# Altium PCB PCB1.PcbDoc
Units mm, origin at the board's own origin, x right, y up, seen from the top; angles counter-clockwise.
Board outline 53.72 x 37.59 mm, 2 copper layers (Top Layer, Bottom Layer); 50 components, 30 nets, 167 pads, 46 vias.
Unrouted connection lines stored in the file: 2.
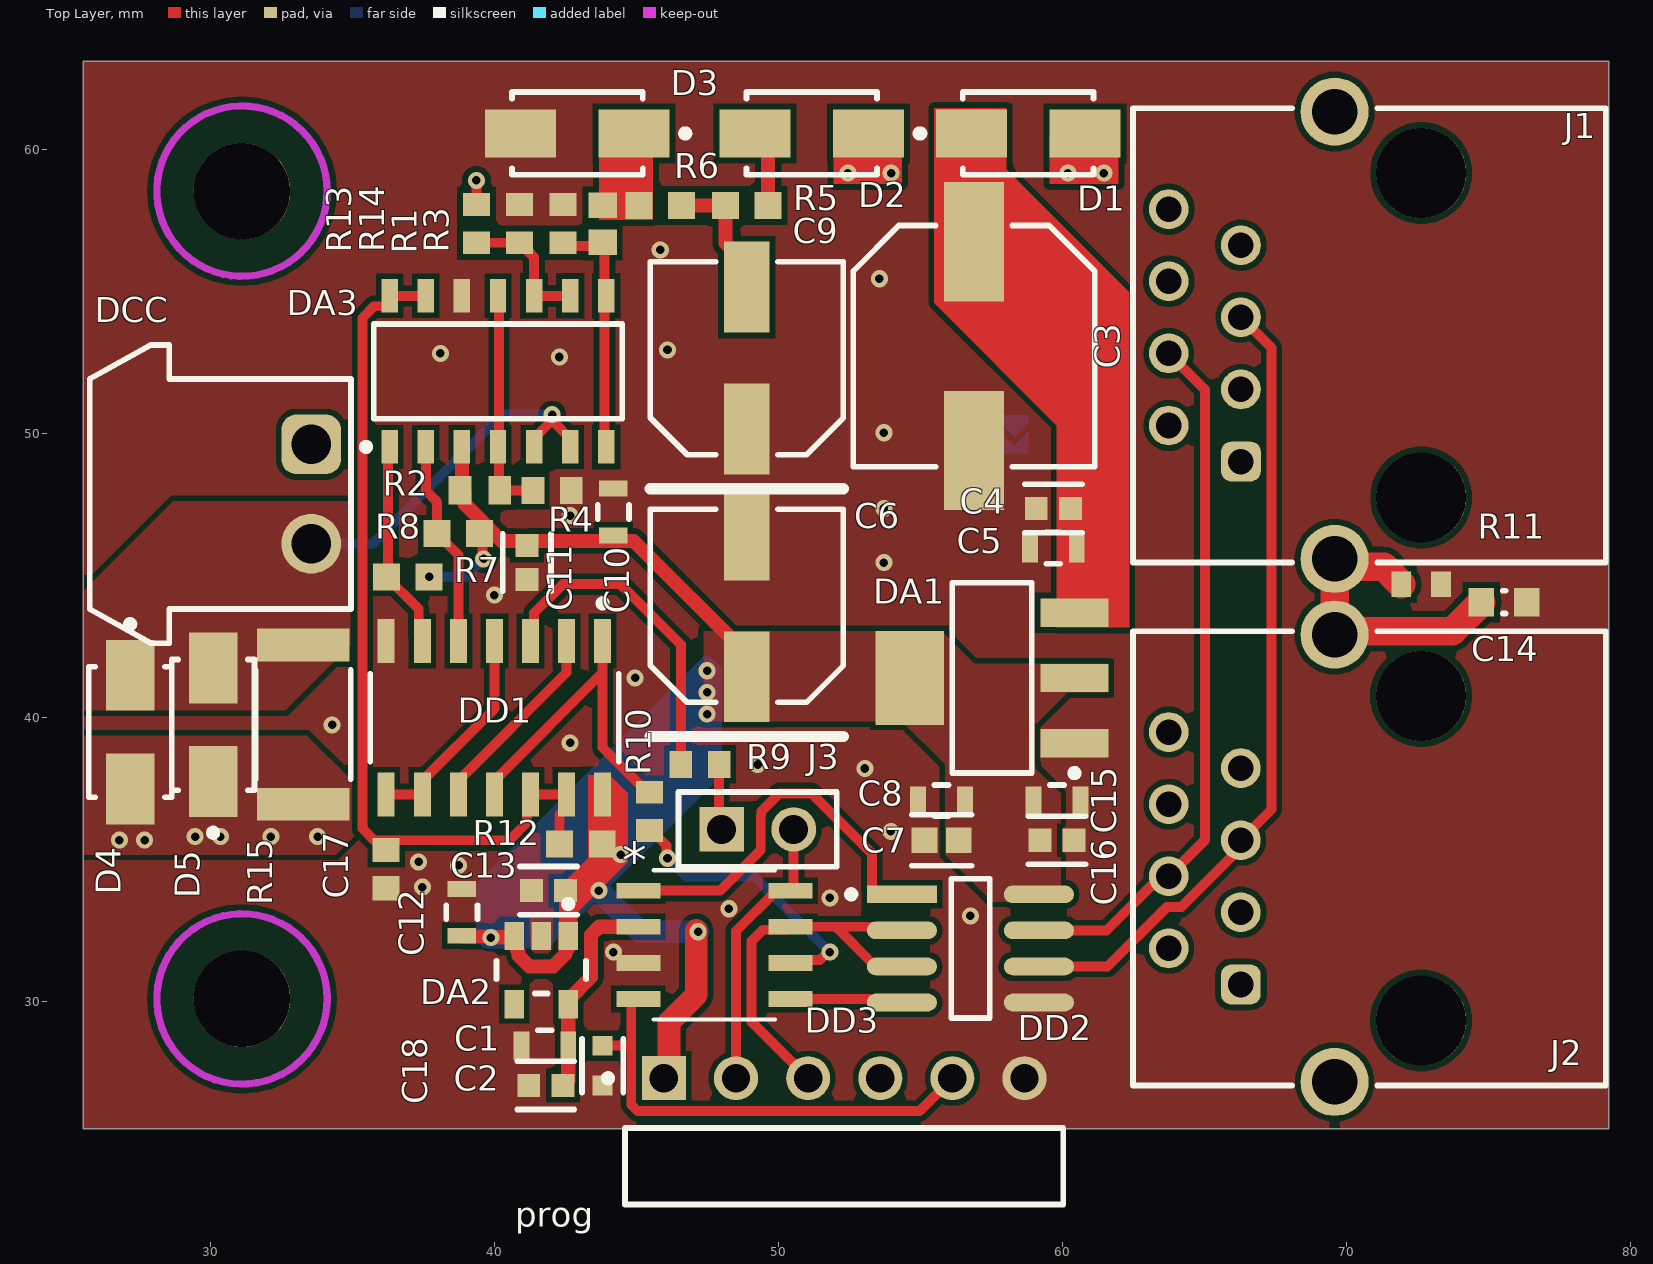
[diagram p0: Top Layer view]
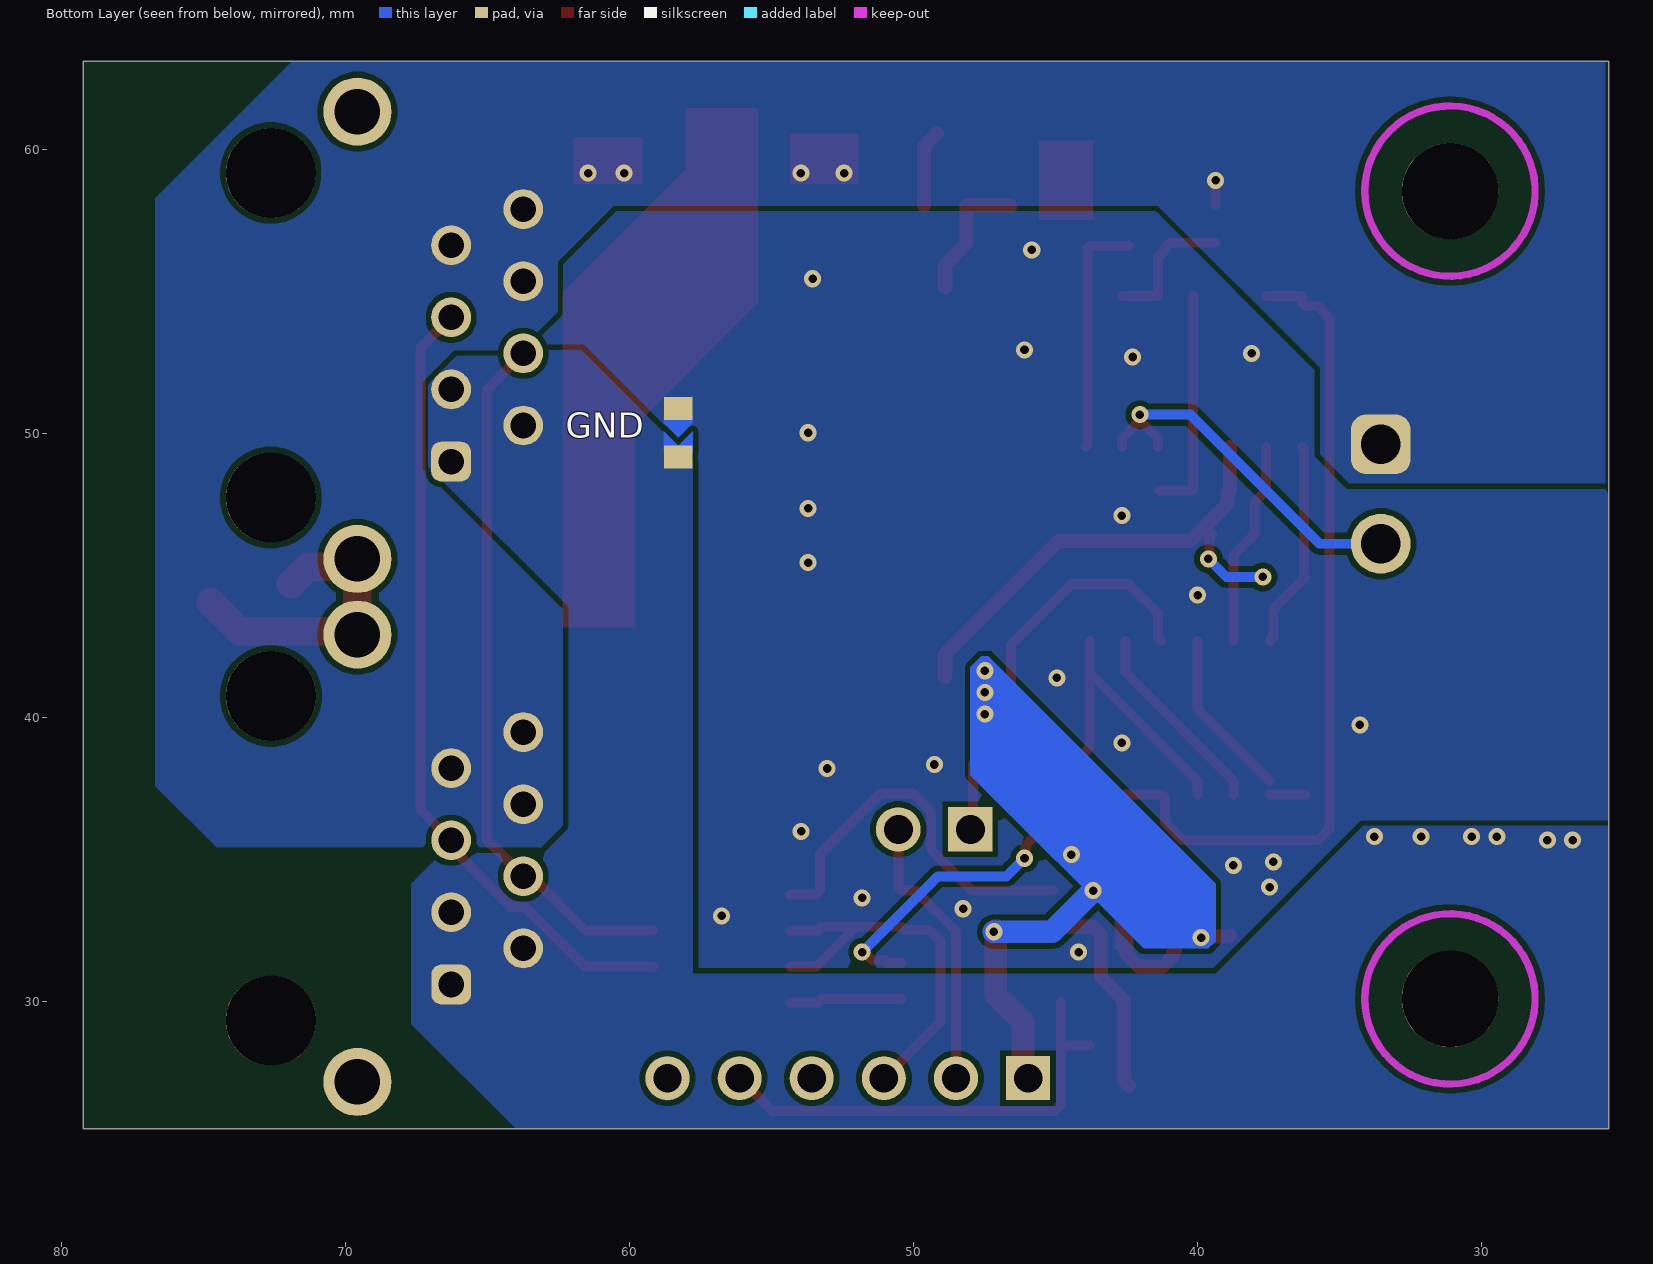
[diagram p1: Bottom Layer view, seen from below]
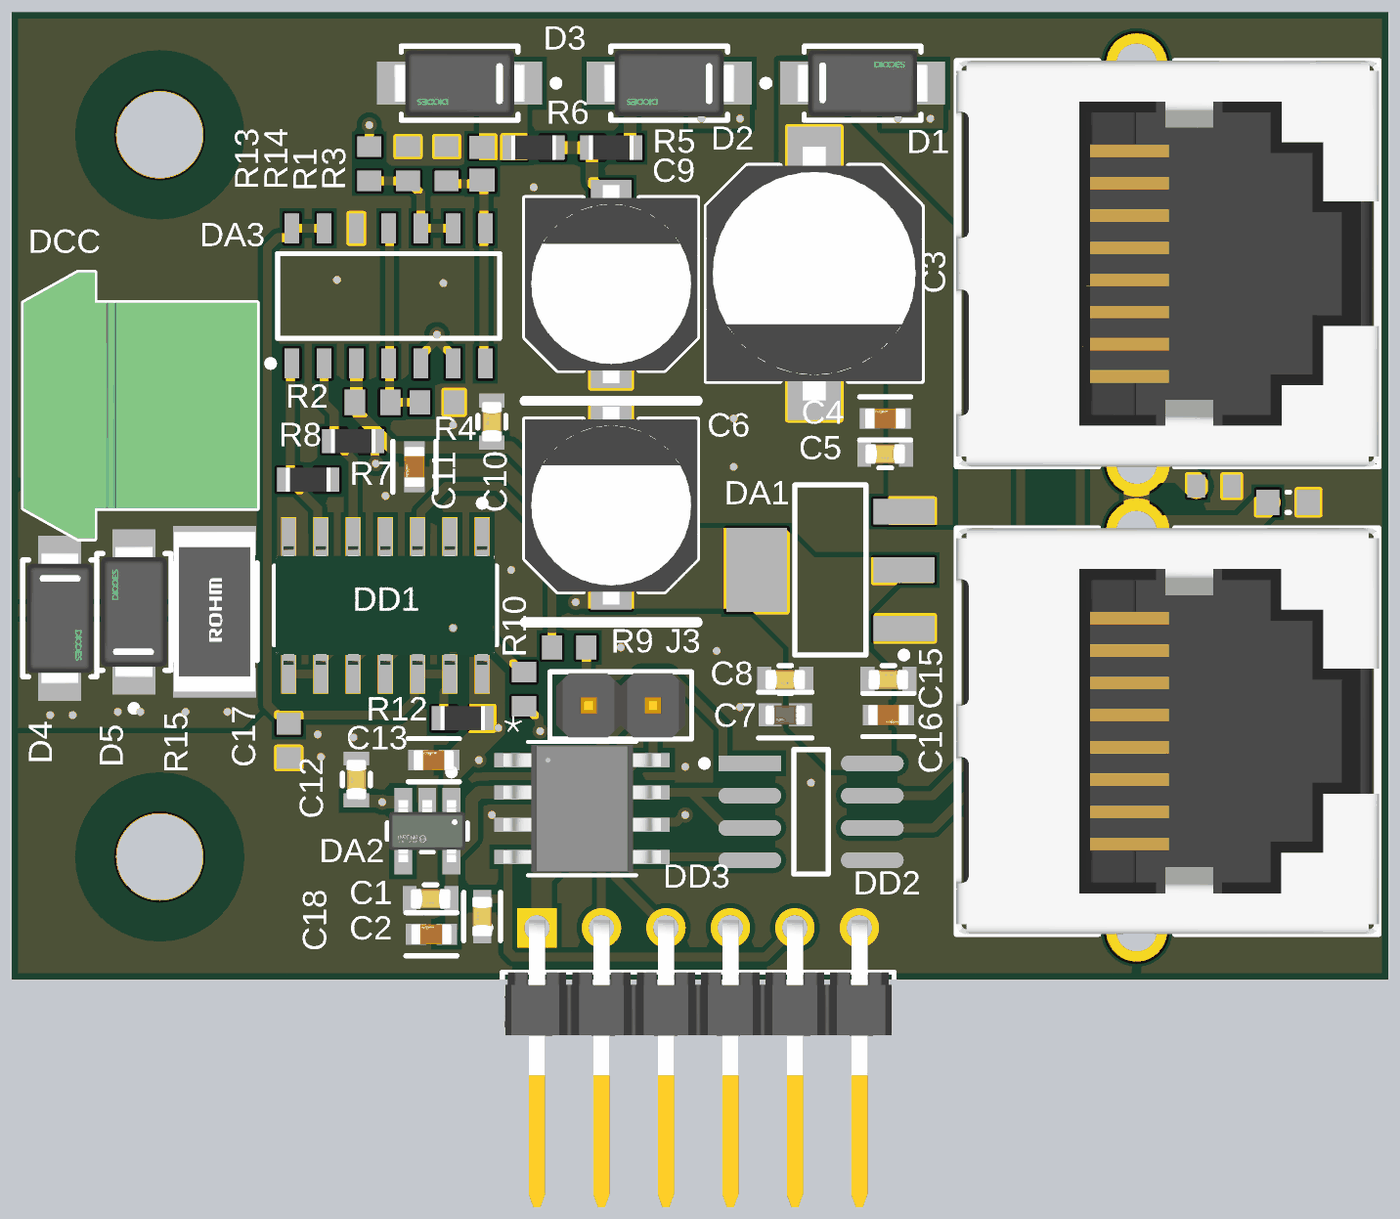
[diagram p2: 3D render of the assembled board from above, using the file's embedded part models]

## Layer stack, top to bottom
Top Solder: solder mask 0.0102, Solder Resist, Dk 3.5
Top Layer: signal copper 0.0356
Dielectric 1: dielectric 0.32, FR-4, Dk 4.8
Bottom Layer: signal copper 0.0356
Bottom Solder: solder mask 0.0102, Solder Resist, Dk 3.5

## Board outline
25.527,25.527 25.527,63.119 79.248,63.119 79.248,25.527

## Design rules (kind name [scope] priority, off if disabled: settings)
Clearance [All] p1: gap=0.2 ignorepadtopadclearanceinfootprint=FALSE
PolygonConnect [All] p1: connectstyle=Direct reliefconductorwidth=0.254 reliefentries=4 polygonreliefangle="90 Angle" airgapwidth=0.254
RoutingVias [All] p1: holewidth=0.3 width=0.7 viastyle="Through Hole" minholewidth=0.3 minwidth=0.5 maxholewidth=3 maxwidth=5
SolderMaskExpansion [All] p1: expansion=0.102 istentingtop=FALSE
SupplyNets "Schematic Supply Nets_1" [InNet('GND')] p1: voltage=0.000
SupplyNets "Schematic Supply Nets_5" [InNet('-V')] p2: voltage=0.000
SupplyNets "Schematic Supply Nets_3" [InNet('+12V')] p3: voltage=0.000
SupplyNets "Schematic Supply Nets_2" [InNet('+5V')] p4: voltage=0.000
SupplyNets "Schematic Supply Nets" [InNet('+3V3')] p5: voltage=0.000
Width [All] p1: maxlimit=1 minlimit=0.254 preferedwidth=0.3
30 further rules are at their usual default settings.

## Components (designator, comment, footprint, x,y, rotation, side; value= is the part's Value field where it differs from the comment)
C1 "CGA3E2X7R1H104K080AA" FP-CGA3E-0_3-0_1-IPC_C 41.783,28.448 r180 top
C2 "GRM188R60J106ME47D" FP-GRM188-0_1-e0_2_0_55-IPC_C 41.816,27.051 r180 top
C3 "EEE-FK1E221P" PNSC-EEE-FK1E221P_N 56.896,53.086 r270 top value=220uF
C4 "GRM188R60J106ME47D" FP-GRM188-0_1-e0_2_0_55-IPC_C 59.69,47.371 r180 top
C5 "CGA3E2X7R1H104K080AA" FP-CGA3E-0_3-0_1-IPC_C 59.69,45.974 r180 top
C6 "EEEFK1E101XP" PNSC-FK-V-D8_V 48.895,43.942 r90 top
C7 "GRM188R61A226ME15D" FP-GRM188-0_2-IPC_C 55.753,35.687 r180 top
C8 "CGA3E2X7R1H104K080AA" FP-CGA3E-0_3-0_1-IPC_C 55.753,37.084 r180 top
C9 "EEEFK1E101XP" PNSC-FK-V-D8_V 48.895,52.665 r90 top
C10 "CGA3E2X7R1H104K080AA" FP-CGA3E-0_3-0_1-IPC_C 44.196,47.244 r90 top
C11 "GRM188R60J106ME47D" FP-GRM188-0_1-e0_2_0_55-IPC_C 41.148,45.466 r270 top
C12 "CGA3E2X7R1H104K080AA" FP-CGA3E-0_3-0_1-IPC_C 38.862,33.147 r90 top
C13 "GRM188R60J106ME47D" FP-GRM188-0_1-e0_2_0_55-IPC_C 41.91,33.909 r180 top
C14 "CAP 10pF 25V 0603(1608)" CAPC0603(1608)100_N 75.565,44.069 r0 top value=10pF
C15 "CGA3E2X7R1H104K080AA" FP-CGA3E-0_3-0_1-IPC_C 59.817,37.084 r0 top
C16 "GRM188R60J106ME47D" FP-GRM188-0_1-e0_2_0_55-IPC_C 59.817,35.687 r0 top
C17 "GRM188R71H102KA01D" CAPC1608X90X35NL10T15 36.195,34.671 r90 top value=1n
C18 "CGA3E2X7R1H104K080AA" FP-CGA3E-0_3-0_1-MFG 43.815,27.751 r90 top
D1 "B340A-13-F" FP-SMA-MFG 58.801,60.579 r0 top
D2 "B340A-13-F" FP-SMA-MFG 51.181,60.579 r180 top
D3 "B340A-13-F" FP-SMA-MFG 42.926,60.579 r180 top
D4 "B340A-13-F" FP-SMA-MFG 27.178,39.497 r270 top
D5 "B340A-13-F" FP-SMA-MFG 30.099,39.751 r90 top
DA1 "LD1117S50CTR" SOT-223_N 57.531,41.402 r180 top
DA2 "NCP114ASN330T1G" FP-483-MFG 41.656,31.115 r270 top
DA3 "LM339DR2G" ONSC-SOIC-14-751A-03_V 40.132,52.197 r90 top
DCC "15EDGRC-3.5-02" 691305140002 30.353,47.879 r270 top
DD1 "CD4001BM" FP-D0014A-MFG 40.005,40.005 r270 top
DD2 "THVD1500D" FP-D0008B-IPC_A 56.769,31.877 r0 top
DD3 "STM32G031J6Mx" SO-8 47.752,32.004 r0 top value=Value
GND "" JP_SMD 58.293,50.038 r90 bottom
J1 "615008140421" 615008140421 70.82,53.468 r90 top
J2 "615008140421" 615008140421 70.818,35.052 r90 top
J3 "M20-9990245" FP-M20-9990245-MFG 49.276,36.068 r0 top
prog "901210766" FP-901210766-MFG 52.324,24.305 r0 top
R1 "ERJ3EKF8203V" RESC1608X55X30NL15T15#1 42.418,57.404 r90 top value=820
R2 "RK73H1JTTD2703F" RESC1608X55X30NL20T10 39.497,48.006 r180 top value=270k
R3 "ERA3AEB333V" RESC1608X55X30NL20T20 43.815,57.404 r270 top value=33k
R4 "ERJ-3EKF1001V" RESC1608X55X30NL15T15#1 42.037,48.006 r180 top value=1k
R5 "ERJ-3EKF2200V" RESC1608X55X30NL15T15#2 48.895,58.039 r0 top value=220
R6 "ERJ-3EKF2200V" RESC1608X55X30NL15T15#2 45.847,58.039 r180 top value=220
R7 "ERJ3EKF1002V" RESC1609X55X30NL15T15 36.957,44.958 r180 top value=10k
R8 "ERJ3EKF1002V" RESC1609X55X30NL15T15 38.735,46.482 r180 top value=10k
R9 "ERJ-3EKF1001V" RESC1608X55X30NL15T15#1 47.244,38.354 r180 top value=1k
R10 "ERJ-3EKF1001V" RESC1608X55X30NL15T15#1 45.466,36.703 r90 top value=1k
R11 "RC0603FR-071ML" RESC1608X55X25NL10T15 72.644,44.704 r0 top value=1M
R12 "ERJ3EKF1002V" RESC1609X55X30NL15T15 43.053,35.56 r180 top value=10k
R13 "ERJ-3EKF1003V" RESC1608X55X30NL15T15#1 39.37,57.404 r90 top value=100k
R14 "ERJ-3EKF1001V" RESC1608X55X30NL15T15#1 40.894,57.404 r90 top value=1k
R15 "MCR100JZHJ1R8" FP-MCR100-IPC_C 33.274,39.758 r90 top

## Footprints (in the part's own frame and the unit in brackets; to place one, negate y for a bottom-side part, rotate by r counter-clockwise, add the part's x,y. Pads: shape width x height; smd on the part's side, far side on the other; paste and mask are expansions set on the pad)
615008140421 [mm] "Modular Jack Vertical Shielded 8P8C Rear Post"
  rrect50% 1.4x1.4 hole 0.9: 1(-4.445,4.524)
  round 1.4 hole 0.9: 2(-3.175,7.064) 3(-1.905,4.524) 4(-0.635,7.064) 5(0.635,4.524) 6(1.905,7.064) 7(3.175,4.524) 8(4.445,7.064)
  round 3.17 hole 3.17 unplated: M1(-5.715,-1.826) M2(5.715,-1.826)
  round 2.4 hole 1.6: Shell(-7.875,1.224) Shell(7.875,1.224)
  silkscreen extent -8,-8.32 8,8.32, body extent -8,-8.32 8,8.33, height 16.65
691305140002 [mm] "Horizontal PCB Header with Plastic Latch, pitch 3.5mm, 02p"
  rrect50% 2.1x2.1 hole 1.4: 1(-1.75,3.2)
  round 2.1 hole 1.4: 2(1.75,3.2)
  silkscreen extent -5.25,-4.6 5.25,4.6, body extent -5.25,-4.6 5.25,4.6, height 7.25
CAPC0603(1608)100_N [mm] "Chip Capacitor, Body 1.6x0.8mm, Height 1.0mm, IPC Medium Density"
  rect 0.9x1 smd: 1(-0.8,0) 2(0.8,0)
  silkscreen extent -0.05,-0.4 0.05,0.4, body extent -0.87,-0.48 0.88,0.47, height 1
CAPC1608X90X35NL10T15 [mm] "Chip Capacitor, 2-Leads, Body 1.60x0.80mm, IPC Medium Density"
  rect 0.85x0.95 smd: 1(-0.675,0) 2(0.675,0)
  body extent -0.85,-0.45 0.85,0.45, height 0.9
FP-483-MFG [mm]
  rect 1x0.7 smd paste+0 mask+0: 1(-1.2,0.95) 2(-1.2,0) 3(-1.2,-0.95) 4(1.2,-0.95) 5(1.2,0.95)
  silkscreen extent -2.45,-1.58 0.82,1.58, body extent -1.22,-1.5 1.22,1.5, height 1.1
FP-901210766-MFG [mm]
  rect 1.55x1.55 hole 1 paste-2539.97 mask+0: 1(-6.35,3)
  round 1.55 hole 1 paste-2539.97 mask+0: 2(-3.81,3) 3(-1.27,3) 4(1.27,3) 5(3.81,3) 6(6.35,3)
  silkscreen extent -8.44,-1.45 7.72,3.12, body extent -7.82,-8.5 7.82,3.88, height 0.25
FP-CGA3E-0_3-0_1-IPC_C [mm]
  rect 0.556x1.006 smd paste+0 mask+0: 1(-0.825,0) 2(0.825,0)
  silkscreen extent -0.25,-0.55 0.25,0.55, body extent -1.2,-0.65 1.2,0.65, height 0.25
FP-CGA3E-0_3-0_1-MFG [mm]
  rect 0.7x0.7 smd paste+0 mask+0: 1(-0.7,0) 2(0.7,0)
  silkscreen extent -0.95,-0.72 0.95,0.72, body extent -1.15,-0.65 1.15,0.65, height 0.25
FP-D0008B-IPC_A [mm]
  rect 2.469x0.622 smd paste+0 mask+0: 1(-2.414,1.905)
  rrect100% 2.469x0.622 smd paste+0 mask+0: 2(-2.414,0.635) 3(-2.414,-0.635) 4(-2.414,-1.905) 5(2.414,-1.905) 6(2.414,-0.635) 7(2.414,0.635) 8(2.414,1.905)
  silkscreen extent -4.32,-2.45 0.68,2.45
FP-D0014A-MFG [mm]
  rect 1.55x0.6 smd paste-1000 mask+0: 1(-2.7,3.81) 2(-2.7,2.54) 3(-2.7,1.27) 4(-2.7,0) 5(-2.7,-1.27) 6(-2.7,-2.54) 7(-2.7,-3.81) 8(2.7,-3.81) 9(2.7,-2.54) 10(2.7,-1.27) 11(2.7,0) 12(2.7,1.27) 13(2.7,2.54) 14(2.7,3.81)
  silkscreen extent -4.15,-4.38 1.55,4.38, body extent -3.57,-4.62 3.57,4.62, height 0.25
FP-GRM188-0_1-e0_2_0_55-IPC_C [mm]
  rect 0.808x0.812 smd paste+0 mask+0: 1(-0.602,0) 2(0.602,0)
  silkscreen extent -1.01,-0.85 1.01,0.85, body extent -1.11,-0.55 1.11,0.55, height 0.25
FP-GRM188-0_2-IPC_C [mm]
  rect 0.905x0.906 smd paste+0 mask+0: 1(-0.601,0) 2(0.601,0)
  silkscreen extent -1.05,-0.9 1.05,0.9, body extent -0.8,-0.4 0.8,0.4, height 1
FP-M20-9990245-MFG [mm]
  rect 1.57x1.57 hole 1.02 paste-2539.97 mask+0: 1(-1.27,0)
  round 1.57 hole 1.02 paste-2539.97 mask+0: 2(1.27,0)
  silkscreen extent -2.79,-1.32 2.79,1.32, body extent -2.89,-1.42 2.89,1.42, height 0.25
FP-MCR100-IPC_C [mil]
  rect 45.5x128.28 smd paste+0 mask+0: 1(-110.29,0) 2(110.29,0)
  silkscreen extent -76,-66 76,66, body extent -137,-70 137,70, height 10
FP-SMA-MFG [mm]
  rect 2.5x1.7 smd paste+0 mask+0: 1(-2,0) 2(2,0)
  silkscreen extent -3.92,-1.46 2.3,1.46, body extent -2.6,-1.3 2.6,1.3, height 2.4
JP_SMD [mil]
  rect 32x40 smd: 1(33.75,0) 2(-33.75,0)
  Top Layer region: -28.25,0 -18,0 2,20 -28.25,20
  Top Layer region: -28.25,0 -18,0 2,-20 -28.25,-20
  Top Layer region: 24,20 14,20 -6,0 14,-20 24,-20
ONSC-SOIC-14-751A-03_V [mm] "SOIC, 14-Leads, Body 8.75x4mm, Pitch 1.27mm"
  rect 1.18x0.58 smd: 1(-2.66,3.81) 2(-2.66,2.54) 3(-2.66,1.27) 4(-2.66,0) 5(-2.66,-1.27) 6(-2.66,-2.54) 7(-2.66,-3.81) 8(2.66,-3.81) 9(2.66,-2.54) 10(2.66,-1.27) 11(2.66,0) 12(2.66,1.27) 13(2.66,2.54) 14(2.66,3.81)
  silkscreen extent -2.78,-4.38 1.67,4.77, body extent -2,-4.38 2,4.38, height 1.75
PNSC-EEE-FK1E221P_N [mm] "CAPAE, 2-Leads, Body 8.5x8.5mm, IPC Medium Density"
  rect 4.2x2.1 smd: 1(-3.675,0) 2(3.675,0)
  silkscreen extent -4.25,-4.25 4.25,4.25, body extent -5,-4.25 5,4.25, height 10.5
PNSC-FK-V-D8_V [mm] "CAPAE, 2-Leads, Body 6.80x6.80mm"
  rect 3.2x1.6 smd: 1(-2.5,0) 2(2.5,0)
  silkscreen extent -4.6,-3.4 3.4,3.4, body extent -3.9,-3.4 3.9,3.4, height 8
RESC1608X55X25NL10T15 [mm] "Chip Resistor, 2-Leads, Body 1.70x0.90mm, IPC Medium Density"
  rect 0.7x0.9 smd: 1(-0.7,0) 2(0.7,0)
  body extent -0.85,-0.45 0.85,0.45, height 0.55
RESC1608X55X30NL15T15#1 [mm] "Chip Resistor, 2-Leads, Body 1.60x0.80mm, IPC Medium Density"
  rect 0.8x0.95 smd: 1(-0.675,0) 2(0.675,0)
  body extent -0.87,-0.48 0.87,0.48, height 0.55
RESC1608X55X30NL15T15#2 [mm] "Chip Resistor, 2-Leads, Body 1.75x0.95mm, IPC Medium Density"
  rect 0.95x0.95 smd: 1(-0.75,0) 2(0.75,0)
  body extent -0.87,-0.48 0.87,0.48, height 0.55
RESC1608X55X30NL20T10 [mm] "Chip Resistor, 2-Leads, Body 1.60x0.80mm, IPC Medium Density"
  rect 0.8x1 smd: 1(-0.7,0) 2(0.7,0)
  body extent -0.9,-0.5 0.9,0.5, height 0.55
RESC1608X55X30NL20T20 [mm] "Chip Resistor, 2-Leads, Body 1.60x0.80mm, IPC Medium Density"
  rect 0.9x1 smd: 1(-0.65,0) 2(0.65,0)
  body extent -0.9,-0.5 0.9,0.5, height 0.55
RESC1609X55X30NL15T15 [mm] "Chip Resistor, 2-Leads, Body 1.75x0.95mm, IPC Medium Density"
  rect 0.95x0.95 smd: 1(-0.75,0) 2(0.75,0)
  body extent -0.87,-0.48 0.87,0.48, height 0.55
SO-8 [mil] "STM32 package, SO8N, 4.9 x 6mm"
  rect 61x22 smd paste+0 mask+0: 1(-105.5,75) 2(-105.5,25) 3(-105.5,-25) 4(-105.5,-75) 5(105.5,-75) 6(105.5,-25) 7(105.5,25) 8(105.5,75)
  silkscreen extent -84,-104 84,104, body extent -122,-98 122,99, height 69
SOT-223_N [mm] "SOT223, 4-Leads, Body 6.5x3.5mm, Pitch 2.3mm, Lead Span 7mm, IPC Medium Density"
  rect 2.4x1 smd: 1(-2.9,2.3) 2(-2.9,0) 3(-2.9,-2.3)
  rect 2.4x3.3 smd: 4(2.9,0)
  silkscreen extent -3.03,-3.35 1.4,3.47, body extent -1.85,-3.35 1.85,3.35, height 1.8

## Part data
C1 C5 C8 C10 C12 C15 C18: library part CMP-2000-07546-2, "Cap Ceramic 100nF 50V X7R 10% Pad SMD 0603 +125°C Automotive T/R", Capacitance=100nF, Case Code (Imperial)=0603, Case Code (Metric)=1608, Dielectric=X7R, Max Operating Temperature=125°C, Min Operating Temperature=-55°C, Package Quantity=1, Ratings=AEC-Q200, Tolerance=10%, Voltage=50V, Case/Package=0603, Composition=Ceramic, Depth=0.8mm, Height=0.8mm, Lead Free="Lead Free", Length=1.6mm, Mount="Surface Mount", Packaging="Tape and Reel", Radiation Hardening=No, REACH SVHC="No SVHC", Termination=SMD/SMT, Thickness=0.035inch, Voltage Rating=50V, Voltage Rating (DC)=50V, Weight=7.1E-05oz, Width=0.8mm
C2 C4 C11 C13 C16: library part CMP-2006-02792-2, "Chip Multilayer Ceramic Capacitors for General Purpose, 0603, 10uF, X5R, 15%, 20%, 6.3V", Capacitance=10uF, Case Code (Imperial)=0603, Case Code (Metric)=1608, Dielectric=X5R, Max Operating Temperature=85°C, Min Operating Temperature=-55°C, Package Quantity=4000, Tolerance=20%, Voltage=6.3V, Case/Package=0603, Depth=0.8mm, Height=0.8mm, Lead Free="Lead Free", Length=1.6mm, Material=Ceramic, Mount="Surface Mount", Packaging="Tape and Reel", Radiation Hardening=No, REACH SVHC="No SVHC", Termination=SMD/SMT, Thickness=0.035inch, Voltage Rating=6.3V, Voltage Rating (DC)=6.3V, Width=0.031inch
C3: library part CMP-1665-00017-3, "Aluminum Electrolytic Capacitor, 220 uF, +/- 20%, 25 V, -55 to 105 degC, 2-Pin CAPAE, RoHS, Tape and Reel", Manufacturer=Panasonic, Max Operating Temperature="105 degC", Min Operating Temperature="-55 degC", Package Quantity=500, Voltage Rating="25 V", ComponentLink1Description="Manufacturer URL", ComponentLink1URL=http://www.panasonic.com/, ComponentLink2Description=Datasheet, ComponentLink2URL=http://industrial.panasonic.com/cdbs/www-data/pdf/RDE0000/ABA0000C1181.pdf, DatasheetVersion=03/2016, Height="10.2 mm", Lead Pitch="3.1 mm", Length="10.2 mm", Mount="Surface Mount", Mounting Technology="Surface Mount", PackageDescription="2-Pin Electrolytic Aluminum Capacitor, Body 8.3 x 8.3 mm", PackageReference=EEE-FK1E221P, Packaging="Tape and Reel", Pins=2, REACH SVHC="No SVHC", RoHSCompliant=true
C6 C9: library part CMP-2000-06206-1, "Aluminum Electrolytic Capacitor, 100 uF, +/- 20%, 25 V, 2-Pin SMD (Size Code D8), -55 to 105 degC, RoHS, Tape and Reel", Capacitance=100µF, Case Size/Dimension=Ø6.3x7.7mm, Lifetime@Temperature=2000Hrs@105°C, Manufacturer=Panasonic, Operating Temp Range=-55to+105°C, Operating Temp-Max=105°C, Package Description="2-Pin Electrolytic Aluminum Capacitor, Body 6.6 x 6.6 mm", Package Reference=FK-V-D8, Rated Voltage=25V, Ripple Current=280mA, Datasheet URL=http://industrial.panasonic.com/cdbs/www-data/pdf/RDE0000/ABA0000C1181.pdf, Datasheet Version=03/2016, Impedance=0.34O, Manufacturer URL=http://www.panasonic.com/, Mounting Technology=SurfaceMount, Package URL=http://industrial.panasonic.com/cdbs/www-data/pdf/RDE0000/DME0000COL48.pdf, Series=FK, Type=Can
C7: library part CMP-2000-06337-3, "Chip Multilayer Ceramic Capacitors for General Purpose, 0603, 22uF, X5R, 15%, 20%, 10V", Capacitance=22uF, Case Code (Imperial)=0603, Case Code (Metric)=1608, Dielectric=X5R, Max Operating Temperature=85°C, Min Operating Temperature=-55°C, Package Quantity=4000, Tolerance=20%, Voltage Rating=10V, Case/Package=0603, Depth=0.8mm, Height=0.8mm, Lead Free="Lead Free", Length=1.6mm, Material=Ceramic, Mount="Surface Mount", Packaging="Tape and Reel", REACH SVHC="No SVHC", Termination=SMD/SMT, Thickness=0.039inch, Voltage Rating (DC)=10V, Weight=0.000222oz, Width=0.8mm
C14: library part CMP-1035-00549-1, "CAP 10pF 25V ±1% 0603 (1608 Metric) Thickness 1mm SMD", Case-EIA=0603, Case-Metric=1608, Rated Voltage="25 V", Tolerance=Â±1%, Max Thickness="1 mm", Technology=SMT
C17: library part CMP-2006-02891-1, Manufacturer=Murata, Part Number=GRM188R71H102KA01D
D1 D2 D3 D4 D5: library part CMP-1667-00003-3, "DIODE SCHOTTKY 40V 3A SMA", Average Rectified Current=3A, Capacitance=250pF, Case/Package=SMA, Forward Voltage=500mV, Max Forward Surge Current (Ifsm)=80A, Max Operating Temperature=125°C, Max Repetitive Reverse Voltage (Vrrm)=40V, Max Reverse Current=500uA, Min Operating Temperature=-55°C, Package Quantity=5000, Contact Plating=Tin, Current=3A, Current Rating=3A, Element Configuration=Single, Forward Current=3A, Height=2.3mm, Lead Free="Lead Free", Length=4.6mm, Max Reverse Voltage (DC)=40V, Mount="Surface Mount", Number of Pins=2, Output Current=3A, Packaging="Tape and Reel", Peak Non-Repetitive Surge Current=80A, Polarity=Standard, Radiation Hardening=No, REACH SVHC="No SVHC", RoHS Compliant=Yes, Series=-, Termination=SMD/SMT, Voltage=40V, Voltage Rating (DC)=40V, Weight=0.002258oz, Width=2.92mm
DA1: library part CMP-0244-00311-1, "Fixed Low Drop Positive Voltage Regulator, 5V, 4-Pin SOT-223, Tape and Reel", ComponentLink1Description="Manufacturer URL", ComponentLink1URL=http://www.st.com, ComponentLink2Description=Datasheet, ComponentLink2URL=http://www.st.com/internet/com/TECHNICAL_RESOURCES/TECHNICAL_LITERATURE/DATASHEET/CD00000544.pdf, DatasheetVersion=1/11/2011, PackageDescription="4-Pin SOT-223 Package, 6.5 x 3.5 mm Body, 2.3 mm Pitch, 7 mm Lead Span", PackageReference=SOT-223, PackageVersion=2010
DA2: library part CMP-07128-000001-1, "IC REG LINEAR 3.3V 300MA 5TSOP", Dropout Voltage=150mV, Manufacturer="ON Semiconductor", Max Junction Temp=+150°C, Max Supply Voltage=5.5V, Min Supply Voltage=1.7V, Nominal Supply Current=50uA, Output Current=300mA, Output Voltage=3.3V, Package=483, Temperature="to +150°C", Accuracy Percentage=1%, Automotive=No, Category=IC, ComponentLink2Description=Datasheet, ComponentLink2URL=https://www.onsemi.com/pub/Collateral/NCP114-D.PDF, Device Class L1="Integrated Circuits (ICs)", Device Class L2="Power Management ICs", Device Class L3="Voltage Regulators - Linear", Digikey Description="IC REG LINEAR 3.3V 300MA 5TSOP", Footprint Url=https://www.onsemi.com/pub/Collateral/483.PDF, Height=1.1mm, Lead Free=Yes, Manufacturer Part Number=NCP114ASN330T1G, Number of Outputs=1, Octopart=https://octopart.com/ncp114asn330t1g-on+semiconductor-74628742, Output Type=Fixed, RoHS=TRUE, Standoff Height=0.01mm, Temperature Range High=+150°C
DA3: library part CMP-1305-00036-1, "Single Supply Quad Comparators, 0 to 70 degC, 14-Pin SOIC, Pb-Free, Tape and Reel", Manufacturer="On Semiconductor", ComponentLink1Description="Manufacturer URL", ComponentLink1URL=http://www.onsemi.com/, ComponentLink2Description=Datasheet, ComponentLink2URL=http://www.onsemi.com/pub_link/Collateral/LM339-D.PDF, ComponentLink3Description="Package Specification", ComponentLink3URL=http://www.onsemi.com/pub_link/Collateral/751A-03.PDF, DatasheetVersion="Rev. 20", IO Typ (mA)=16, Mounting Technology="Surface Mount", PackageDescription="14-Pin Small Outline Integrated Circuit, Body 8.65 x 3.9 mm, Pitch 1.27 mm", PackageReference=SOIC-14-751A-03, PackageVersion="Rev. K, 05/2011", Packing="Tape and Reel", PartNumber=LM339DR2G, RoHS=TRUE
DCC: library part CMP-1502-01775-2, Gender=Male, Lead Pitch=3.5mm, NexarPartId=78871375, Number of Pins=2, Packaging=Box, RoHS=Non-Compliant
DD1: library part CMP-0806-00066-4, "IC GATE NOR 4CH 2-INP 14SOIC", Case/Package=SOIC, High Level Output Current=-4.2mA, Low Level Output Current=4.2mA, Max Operating Temperature=125°C, Max Supply Voltage=18V, Min Operating Temperature=-55°C, Min Supply Voltage=3V, Output Current=6.8mA, Package Quantity=50, Quiescent Current=5uA, Contact Plating=Gold, Height=1.58mm, Lead Free="Lead Free", Length=8.65mm, Logic Function=NOR, Mount="Surface Mount", Number of Bits=4, Number of Circuits=4, Number of Elements=4, Number of Gates=4, Number of Input Lines=2, Number of Inputs=2, Number of Output Lines=1, Number of Outputs=1, Number of Pins=14, Packaging=Rail/Tube, Propagation Delay=90ns, Radiation Hardening=No, REACH SVHC="No SVHC", Schmitt Trigger Input=No, Turn-On Delay Time=90ns, Weight=0.004564oz, Width=3.91mm
DD2: library part CMP-04875-000034-1, "IC TRANSCEIVER HALF 1/1 8SOIC", Case/Package=VSSOP, Input Bias Current=8pA, Input Offset Voltage (Vos)=200uV, Max Operating Temperature=125°C, Min Operating Temperature=-40°C, Operating Supply Current=1.6mA, Output Current per Channel=75mA, Data Rate=300Kbps, Gain Bandwidth Product=10MHz, Mount="Surface Mount", Number of Circuits=1, Packaging="Tape and Reel", Receiver Hysteresis=50mV, RoHS Compliant=Yes, Simplex/Duplex="Half Duplex", Slew Rate=10V/µs
DD3: "The STM32G031x4/x6/x8 mainstream microcontrollers are based on high-performance Arm® Cortex®-M0+ 32-bit RISC core operating at up to 64 MHz frequency.   / 32 Kbytes of Flash program memory and 8 Kbytes of SRAM. With 28pin UFQFPN 4x4x0.55 package", Manufacturer_Part_Number=stm32g0_so8_t1, Copyright="Copyright (C) 2018 Accelerated Designs. All rights reserved", RefDes=RefDes, Type=DEV, Vendor=STMicroelectronics
GND: library part "Circuit Breaker", "Circuit Breaker", Published=24-Mar-1999, Publisher="Altium Limited", Revision="July-2002: Re-released for DXP Platform.", Solder=NO
J1 J2: library part CMP-1502-01733-2, Color=Black, Contact Resistance=20mΩ, Current Rating=1.5A, Flammability Rating="UL94 V-0", Insulation Resistance=500MΩ, Max Operating Temperature=85°C, Min Operating Temperature=-40°C, Operating Supply Voltage=120V, Connector Type="RJ45, Socket", Contact Material=Copper, Contact Plating=Gold, Depth=16.4mm, Direction="User Selectable", Gender=Female, Height=16.65mm, Housing Material=PBT, Insulation Material=PBT, Lead Free="Lead Free", Length=16.65mm, Mount="Through Hole", NexarPartId=18818182, Number of Contacts=8, Number of Ports=1, Number of Positions=8, Number of Rows=1, Orientation=Vertical, REACH SVHC=Unknown, RoHS=Compliant, Shielding=Shielded, Termination="Through Hole", Voltage Rating=120V, Voltage Rating (AC)=120V, Width=19.5mm
J3: library part CMP-15831-000105-1, "CONN HEADER VERT 2POS 2.54MM", Case/Package=SIL, Color=Black, Contact Resistance=25mR, Current=3A, Flammability Rating="UL94 V-0", Insulation Resistance=10GR, Max Operating Temperature=105°C, Min Operating Temperature=-40°C, Package Quantity=1000, Voltage=50V, Voltage Rating (AC)=750V, Connector Type="Male Pin", Contact Finish - Mating=GOLD, Contact Material=Brass, Contact Mating Length=0.24inch, Contact Plating=Gold, Contact Shape=Square, Contact Type="Male Pin", Current Rating=3A, Depth=2.54mm, Fastening Type=Pull, Gender=Male, Height=0.12inch, Housing Color=Black, Housing Material=Nylon, Insulation Color=Black, Insulation Material=Nylon, Lead Pitch=2.54mm, Length=5.08mm, Mated Stacking Heights=16.54mm, Mating Cycles=300, Max Current Rating=3A, Mount="Through Hole", Number of Contacts=2, Number of Poles=2, Number of Positions=2, Number of Rows=1, Orientation=Straight, Packaging=Bulk, Pitch=2.54mm, Radiation Hardening=No, Reach SVHC Compliant=Yes, Series=M20, Termination=Solder, Weight=0.25lb, Width=0.25inch, Working Voltage=750V
prog: library part CMP-04776-000096-1, "CONN HEADER R/A 6POS 2.54MM", Current Rating=3A, Manufacturer=Molex, Package=0, Temperature="-55°C to +125°C", Temperature Range High=+125°C, Temperature Range Low=-55°C, Voltage Rating=350V, Automotive=No, Category=Conn, ComponentLink2Description=Datasheet, ComponentLink2URL=https://www.molex.com/webdocs/datasheets/pdf/en-us/0901210766_PCB_HEADERS.pdf, Conn Gender=Male, Conn Orientation="Right Angle", Contact Material=Gold,Nickel, Device Class L1=Connectors, Device Class L2="Headers and Wire Housings", Device Class L3=unset, Digikey Description="CONN HEADER R/A 6POS 2.54MM", Footprint Url=https://www.molex.com/pdm_docs/sd/901210766_sd.pdf, Height=3.6mm, Lead Free=Yes, Manufacturer Part Number=901210766, Number of Contacts=6, Number of Rows=1, Octopart=https://octopart.com/90121-0766-molex-655456, Pitch=2.54mm, RoHS=TRUE
R1: library part CMP-2000-00657-1, Manufacturer=Panasonic, Part Number=ERJ3EKF8203V
R2: library part CMP-2000-01368-1, Manufacturer="KOA Speer", Part Number=RK73H1JTTD2703F
R3: library part CMP-2000-00041-1, Manufacturer=Panasonic, Part Number=ERA3AEB333V
R4 R9 R10 R14: library part CMP-2000-00180-1, Manufacturer=Panasonic, Part Number=ERJ-3EKF1001V
R5 R6: library part CMP-2000-00335-2, "Chip Resistor, 220 Ohm, +/- 1%, 0.1 W, -55 to 155 degC, 0603 (1608 Metric), RoHS, Tape and Reel", Case Code (Imperial)=0603, Case Code (Metric)=1608, Max Operating Temperature="155 degC", Min Operating Temperature="-55 degC", Package Quantity=5000, Power Rating="100 mW", Resistance="22 Ohm", Tolerance=1%, Voltage Rating="50 V", Case\Package=0603, ComponentLink1Description="Manufacturer URL", ComponentLink1URL=http://www.panasonic.com/, ComponentLink2Description=Datasheet, ComponentLink2URL=http://industrial.panasonic.com/cdbs/www-data/pdf/RDA0000/AOA0000C86.pdf, DatasheetVersion=Apr-15, Height="0.45 mm", Length="1.6 mm", Mount="Surface Mount", PackageDescription="2-Pin Surface Mount Device, Body 1.6 x 0.85 mm", PackageReference=0603, Packaging="Tape and Reel", Pins=2, REACH SVHC="No SVHC", RoHSCompliant=true, Voltage Rating (DC)="50 V", Width="0.8 mm"
R7 R8 R12: library part CMP-1012-00623-3, "Chip Resistor, 10 KOhm, +/- 1%, 0.1 W, -55 to 155 degC, 0603 (1608 Metric), RoHS, Tape and Reel", Case Code (Imperial)=0603, Case Code (Metric)=1608, Manufacturer=Panasonic, Max Operating Temperature=155degC, Max Power Dissipation=100mW, Min Operating Temperature=-55degC, Package Description="2-Pin Surface Mount Device, Body 1.6 x 0.85 mm", Package Quantity=1, Package Reference=603, Resistance=10KOhm, Temperature Coefficient=100ppm\/degreesC, Tolerance=1%, Voltage Rating=75V, Case\/Package=0603, Composition=ThickFilm, Contact Plating=Tin, Datasheet URL=https://industrial.panasonic.com/cdbs/www-data/pdf/RDA0000/AOA0000C304.pdf, Datasheet Version=02/2017, Depth=0.8mm, Height=0.45mm, Lead Free=LeadFree, Length=1.6mm, Manufacturer URL=http://www.panasonic.com/, Military Standard=Not, Mount=SurfaceMount, Mounting Technology=SurfaceMount, Number of Pins=2, Number of Terminations=2, Packaging=TapeandReel, Power Rating=100mW, Radiation Hardening=No, REACH SVHC=NoSVHC, RoHSCompliant=true, Termination=SMD/SMT, Voltage Rating (DC)=75V, Width=0.031inch
R11: library part CMP-1659-00056-1, "Chip Resistor, 1 MOhm, +/- 1%, 100 mW, -55 to 155 degC, 0603 (1608 Metric), RoHS, Tape and Reel", Capacitance="1 mF", Case\Package=Radial, Max Operating Temperature="85 degC", Min Operating Temperature="-40 degC", Package Quantity=200, Tolerance=20%, Voltage Rating="25 V", ComponentLink1Description="Manufacturer URL", ComponentLink1URL=http://www.yageo.com/, ComponentLink2Description=Datasheet, ComponentLink2URL=http://www.yageo.com/documents/recent/PYu-RC_Group_51_RoHS_L_04.pdf, DatasheetVersion="Rev. 4, 02/2016", Diameter="10 mm", Height="20 mm", Lead Pitch="5 mm", Length="20 mm", Mount="Through Hole", PackageDescription="2-Pin Surface Mount Device, Body 1.6 x 0.8 mm", PackageReference=0603, Packaging=Bulk, Radiation Hardening=No, REACH SVHC="No SVHC", RoHSCompliant=true, Voltage Rating (DC)="25 V", Width="0 inch"
R13: library part CMP-2000-00182-1, Manufacturer=Panasonic, Part Number=ERJ-3EKF1003V
R15: library part CMP-08839-000552-1, "Thick Film Chip Resistor, 2512, 1.8Ω, 5%, +850/+150ppm/°C, 1W, 200V", Case Code (Imperial)=2512, Case Code (Metric)=6432, Max Operating Temperature=125°C, Max Power Dissipation=1W, Min Operating Temperature=-55°C, Resistance=1.8R, Temperature Coefficient=850ppm/°C, Tolerance=5%, Voltage Rating (DC)=200V, Case/Package=2512, Features="Automotive AEC-Q200", Height=0.55mm, Length=6.3mm, Number of Terminations=2, Packaging="Tape and Reel", Power Rating=1W, RoHS Compliant=Yes, Series=MCR, Width=3.2mm

## Free pads (board coordinates)
  round 3.4 hole 3.4: 1(31.115,30.099) 1(31.115,58.547)

## Via types
v1: diameter 0.6, hole 0.3, Top Layer to Bottom Layer, tented both sides, 46 vias

## Nets (pads, with @x,y where several pads share a name; then routed paths per layer and width w, separated by ;. In a path a pad name is that pad's centre, name@x,y a point inside that pad or via, vN(x,y) a via of type N, cw(c..) or ccw(c..) an arc to the next point about the centre after c; other vN are vias at no path point)
+3V3: C1.1 C2.1 DA2.5 DD3.2 | length 7.3
  Top Layer w0.5: C2.1 42.418,27.053 42.606,27.241 DA2.5 ; DA2.5@42.606,30.065 43.406,30.865 43.406,32.346 43.699,32.639 DD3.2
+5V: C6.1 C7.1 C8.1 C10.1 C11.1 C12.1 C13.1 C15.1 C16.1 DA1.2 DA1.4 DA2.1 DA2.3 DA3.3 DD1.14 DD2.8 prog.1 R2.2 R7.1 R8.1 R12.1 | length 33.2
  Top Layer w0.35: R8.1 39.586,46.381 39.586,45.631 v1(39.624,45.593)
  Top Layer w0.5: C12.1 38.89,32.294 39.829,32.294 39.864,32.258 v1(39.878,32.258) 39.888,32.268 40.659,32.268 DA2.3 40.806,32.215 40.806,31.822 40.856,31.772 40.856,31.629 41.243,31.242 42.069,31.242 42.506,31.679 42.506,32.215 DA2.1 ; DA3.3 38.862,48.006 38.947,47.921 38.947,47.54 40.259,46.228 40.699,46.228 40.705,46.222 C11.1@41.148,46.222 ; C11.1@41.148,46.228 44.909,46.228 48.895,42.242 C6.1
  Top Layer w0.8: prog.1 46.156,27.487 46.156,29.28 47.117,30.241 v1@47.117,32.512
  Bottom Layer w0.35: v1(37.707,44.958) 38.989,44.958 v1(39.624,45.593)
  Bottom Layer w0.8: v1(43.688,33.909) 45.133,32.464 v1(47.179,32.464)
  other v1: 44.45,35.179 47.498,40.132 47.498,40.894 47.498,41.656
+12V: C3.1 C4.1 C5.1 D1.1 DA1.3
-V: D3.1 R3.1 R6.2
DCC_J: D1.2 D2.1 DCC.1 J1.6 J1.7 J1.8 J2.6 J2.7 J2.8 R13.2 | length 0.8
  Top Layer w0.35: R13.2 v1(39.37,58.928)
  other v1: 52.451,59.182 53.975,59.182 60.198,59.182 61.468,59.182
DCC_K: D4.2 D5.1 GND.2 J1.1 J1.2 J1.3 J2.1 J2.2 J2.3 R15.1
  other v1: 26.797,35.687 27.686,35.687 29.464,35.814 30.353,35.814 32.131,35.814 33.782,35.814
DCC_K_out: D4.1 D5.2 DA3.5 DA3.6 DCC.2 R15.2 | length 13.2
  Top Layer w0.35: DA3.5 41.402,49.837 41.999,50.434 41.999,50.635 v1(42.037,50.673) 42.075,50.635 42.075,50.434 42.672,49.837 DA3.6
  Bottom Layer w0.35: DCC.2 35.715,46.129 40.259,50.673 v1(42.037,50.673)
GND: C1.2 C2.2 C3.2 C4.2 C5.2 C6.2 C7.2 C8.2 C9.1 C10.2 C11.2 C12.2 C13.2 C14.2 C15.2 C16.2 C17.1 C18.1 D3.2 DA1.1 DA2.2 DA3.12 DD1.7 DD2.5 DD3.3 GND.1 prog.6 R1.2 R4.1 R11.2 R14.2
  other v1: 44.196,31.75 56.769,33.02 48.26,33.274 51.816,33.655 37.465,34.036 38.746,34.804 37.338,34.925 53.97,36.002 53.052,38.213 49.276,38.354 42.672,39.116 34.29,39.751 44.958,41.402 40.005,44.323 53.721,45.466 42.672,47.117 53.721,47.371 53.721,50.038 42.291,52.705 38.1,52.832 46.101,52.959 53.565,55.461 45.846,56.476
N18mV: DA3.7 DA3.8 R1.1 R3.2 | length 8.5
  Top Layer w0.35: R1.1@42.418,56.627 42.431,56.614 43.803,56.614 43.815,56.602 43.878,56.539 43.878,54.857 43.878,49.601 DA3.7
NetC9_2: C9.2 R5.1 R6.1 | length 4.7
  Top Layer w0.5: R6.1 R5.1 48.145,56.715 48.895,55.965 C9.2
NetC14_1: C14.1 J1.Shell J2.Shell R11.1 | length 11
  Top Layer w1: J2.Shell@69.594,27.177 J2.Shell@69.595,27.178 ; J1.Shell@69.595,61.342 J1.Shell@69.596,61.343 ; R11.1 71.323,45.325 69.864,45.325 69.596,45.593 69.595,45.592 69.595,42.928 69.594,42.927 69.719,43.052 73.748,43.052 C14.1
NetC17_2: C17.2 DA3.13 DA3.14 DD1.12 DD1.13 R12.2 | length 31.1
  Top Layer w0.35: DA3.13 DA3.14 36.322,54.607 36.207,54.492 35.765,54.492 35.357,54.083 35.357,36.095 35.765,35.687 40.535,35.687 41.156,36.307 41.156,37.186 DD1.12 DD1.13 42.545,36.83 42.303,36.588 R12.2
NetD2_2: D2.2 R5.2 | length 2.7
  Top Layer w0.5: D2.2 49.645,60.115 R5.2
NetDA3_1: DA3.1 DD1.6 R7.2 | length 7.4
  Top Layer w0.35: DA3.1 36.265,49.48 36.265,45.016 R7.2 37.34,43.825 37.34,42.83 DD1.6
NetDA3_2: DA3.2 DD1.5 R8.2 | length 7.3
  Top Layer w0.35: DA3.2 37.592,47.999 37.985,47.606 R8.2 38.735,45.732 DD1.5
NetDA3_9: DA3.9 DA3.10 R13.1 R14.1 | length 4.9
  Top Layer w0.35: R13.1 R14.1 40.969,56.729 41.194,56.504 41.194,56.429 41.402,56.221 DA3.10 DA3.9
NetDD1_1: DD1.1 DD1.11 R10.2 | length 11.9
  Top Layer w0.35: DD1.11 40.005,37.78 43.815,41.59 ; DD1.1 43.815,41.59 ; R10.2 45.391,37.378 43.815,38.954 43.815,41.59
NetDD1_2: DD1.2 DD1.10 | length 7
  Top Layer w0.35: DD1.10 38.735,37.78 42.545,41.59 DD1.2
NetDD1_3: DD1.3 R9.2 | length 11.7
  Top Layer w0.35: DD1.3 41.4,42.83 41.4,43.686 42.418,44.704 44.45,44.704 46.569,42.585 R9.2
NetDD1_4: DD1.4 DD1.8 DD1.9 | length 7.2
  Top Layer w0.35: DD1.8 DD1.9 ; DD1.9@37.465,37.78 40.005,40.32 DD1.4
NRST: C18.2 DD3.4 prog.5 | length 16.5
  Top Layer w0.35: C18.2 44.824,28.451 ; DD3.4@44.824,29.995 44.824,29.46 44.824,28.451 ; prog.5 54.984,26.155 45.044,26.155 44.824,26.375 44.824,28.451
P18mV: DA3.4 DA3.11 R2.1 R4.2 | length 8
  Top Layer w0.35: DA3.11 40.164,54.825 40.164,48.039 R2.1 R4.2
RailCom_Int: DD3.6 R10.1 | length 9.9
  Top Layer w0.35: R10.1 45.541,36.028 46.063,35.506 46.063,35.09 v1(46.101,35.052) ; DD3.6 50.927,31.369 51.031,31.473 51.472,31.473 51.748,31.75 v1(51.816,31.75)
  Bottom Layer w0.35: v1(46.101,35.052) 46.736,34.417 49.149,34.417 v1(51.816,31.75)
RailCom_RX: J3.1 R9.1 | length 2.3
  Top Layer w0.35: R9.1 47.919,36.155 J3.1
RS_A: DD2.6 J1.5 J2.5 | length 28.4
  Top Layer w0.35: DD2.6 61.599,31.242 63.699,33.342 64.199,33.342 66.294,35.437 J2.5 67.371,36.764 67.371,53.028 J1.5
RS_B: DD2.7 J1.4 J2.4 | length 24.8
  Top Layer w0.35: DD2.7 61.565,32.512 63.47,34.417 J2.4 65.024,35.687 65.024,51.565 J1.4
RS_RX: DD2.1 DD3.1 | length 13.7
  Top Layer w0.35: DD3.1 47.947,33.909 49.386,35.348 49.386,36.548 49.403,36.565 49.403,36.703 50.038,37.338 51.181,37.338 53.296,35.223 53.296,33.918 53.432,33.782 DD2.1
RS_TX: DD2.4 DD3.5 | length 4
  Top Layer w0.35: DD3.5 53.231,30.099 53.358,29.972 DD2.4
SWD_CLK/Rail_RX: DD3.8 J3.2 prog.2 | length 9.9
  Top Layer w0.35: prog.2 48.514,32.487 49.936,33.909 DD3.8 ; DD3.8@50.442,33.909 50.546,34.013 J3.2
SWD_IO/RS_DE/R\E\: DD2.2 DD2.3 DD3.7 prog.3 | length 14.1
  Top Layer w0.35: prog.3 49.064,29.295 49.064,32.131 49.468,32.535 50.327,32.535 DD3.7 52.035,32.639 ; DD2.3 53.432,31.242 52.035,32.639 ; DD2.2 53.358,32.512 53.231,32.639 52.035,32.639
pads on no net: DA2.4 J1.M1 J1.M2 J2.M1 J2.M2 prog.4

## Polygon pours and split planes (outlines as drawn)
GND on Bottom Layer "GND_L02_P015" (solid, remove dead copper, pour order 15): 25.527,25.527 79.248,25.527 79.248,63.119 25.527,63.119
DCC_K on Bottom Layer "DCC_K_L02_P010" (solid, remove dead copper, pour order 10): 67.691,30.988 67.691,29.21 64.008,25.527 25.527,25.527 25.527,36.195 34.163,36.195 39.37,30.988 59.309,30.988
DCC_J on Bottom Layer "DCC_J_L02_P009" (solid, remove dead copper, pour order 9): 64.933,53.672 60.565,58.039 41.402,58.039 35.687,52.324 35.687,49.276 34.671,48.26 25.654,48.26 25.654,63.119 71.882,63.119 76.708,58.293 76.708,53.609
DCC_J on Bottom Layer "DCC_J_L02_P007" (solid, remove dead copper, pour order 7): 63.754,59.309 62.547,58.293 62.547,54.292 63.891,52.949 66.177,52.949 67.31,51.816 67.31,48.768 62.357,43.815 62.357,36.195 63.119,35.433 74.549,35.433 76.708,37.592 76.708,56.769 74.168,59.309
DCC_K on Bottom Layer "DCC_K_L02_P008" (solid, remove dead copper, pour order 8): 67.31,51.816 67.31,48.768 62.357,43.815 62.357,36.195 63.119,35.433 66.421,35.433 67.691,34.163 67.691,29.21 66.548,28.067 60.706,28.067 57.785,30.988 57.785,49.022 61.722,52.959 61.732,52.949 66.177,52.949
GND on Top Layer "GND_L01_P014" (solid, remove dead copper, pour order 14): 25.527,25.527 79.248,25.527 79.248,63.119 25.527,63.119
+5V on Top Layer "+5V_L01_P013" (solid, remove dead copper, pour order 13): 61.595,41.91 56.896,41.91 55.753,43.053 47.371,43.053 47.371,39.878 54.356,39.878 55.88,38.354 55.88,35.179 57.531,33.528 59.69,33.528 59.944,33.782 59.944,37.338 59.055,38.227 59.055,39.751 60.198,40.894 61.595,40.894
DCC_K_out on Top Layer "DCC_K_OUT_L01_P012" (solid, remove dead copper, pour order 12): 34.925,47.625 28.702,47.625 25.527,44.45 25.527,40.259 32.639,40.259 34.925,42.545 34.925,42.926
DCC_K on Top Layer "DCC_K_L01_P011" (solid, remove dead copper, pour order 11): 25.527,39.37 33.401,39.37 35.052,37.719 35.052,35.814 34.417,35.179 25.527,35.179

## Keep-outs
Keep-Out Layer:
  circle w0.254: c31.115,30.099 r3
  circle w0.254: c31.115,58.547 r3

## Other copper
Top Layer:
  rectangle net DCC_J: 59.563,58.801 61.976,60.452
  rectangle net DCC_J: 51.943,58.801 54.356,60.579
  rectangle net -V: 43.688,57.531 45.593,60.325
  region net +5V: 44.069,37.973 44.704,37.338 44.704,34.925 42.926,33.147 42.926,31.877 42.672,31.623 42.291,31.623 42.291,34.036 43.307,35.052 43.307,37.973
  region net +12V: 55.499,61.468 55.499,54.61 59.817,50.292 59.817,43.18 62.357,43.18 62.357,54.991 58.039,59.309 58.039,61.468
Bottom Layer:
  region net +5V: 47.625,42.164 48.006,41.783 48.006,37.973 41.91,31.877 39.624,31.877 39.37,32.131 39.37,34.163 47.371,42.164

## Silkscreen, mask and mechanical layers (free items; w line width, h text height)
Board Shape:
  the board outline again, w0.5

## Dimensions
31.115,58.547 to 25.527,63.119 on Assembly Notes
31.115,30.099 to 25.527,25.527 on Assembly Notes
79.248,63.119 to 79.248,25.527 on Assembly Notes
25.527,63.119 to 79.248,63.119 on Assembly Notes
31.115,30.099 to 31.115,58.547 on Assembly Notes
79.248,25.527 to 79.248,63.119 on Top Component Center
25.527,25.527 to 79.248,25.527 on Top Component Center

## Text inside footprints (layer, text, board x,y; h text height)
DD3: Top 3D Body "*" at 45.809,33.16 h1.27; Top Overlay "*" at 44.501,34.341 h1.27; Mechanical 7 "0.033in/0.838mm" at 42.691,26.454 h0.64; Mechanical 7 "0.05in/1.27mm" at 37.897,32.956 h0.64; Mechanical 7 "0.197in/5.004mm" at 52.807,31.686 h0.64; Mechanical 7 "0.244in/6.198mm" at 45.371,38.824 h0.64; Mechanical 7 "0.158in/4.013mm" at 45.371,36.919 h0.64; Mechanical 7 "Alt 2 Padstyle: OX90Y60D30P" at 39.179,16.802 h1.27; Mechanical 7 "Alt 1 Padstyle: OX60Y90D30P" at 39.179,18.326 h1.27; Mechanical 7 "Pin One Padstyle: RX61Y22D0T" at 38.862,22.898 h1.27; Mechanical 7 "Default Padstyle: RX61Y22D0T" at 38.862,24.422 h1.27